# Altium PCB PCB.PcbDoc
Units mil, origin at the board's own origin, x right, y up, seen from the top; angles counter-clockwise.
Board outline 840 x 1570 mil, 2 copper layers (Top Layer, Bottom Layer), stack 61.855 mil thick; 29 components, 28 nets, 130 pads, 35 vias.
Unrouted connection lines stored in the file: 1.
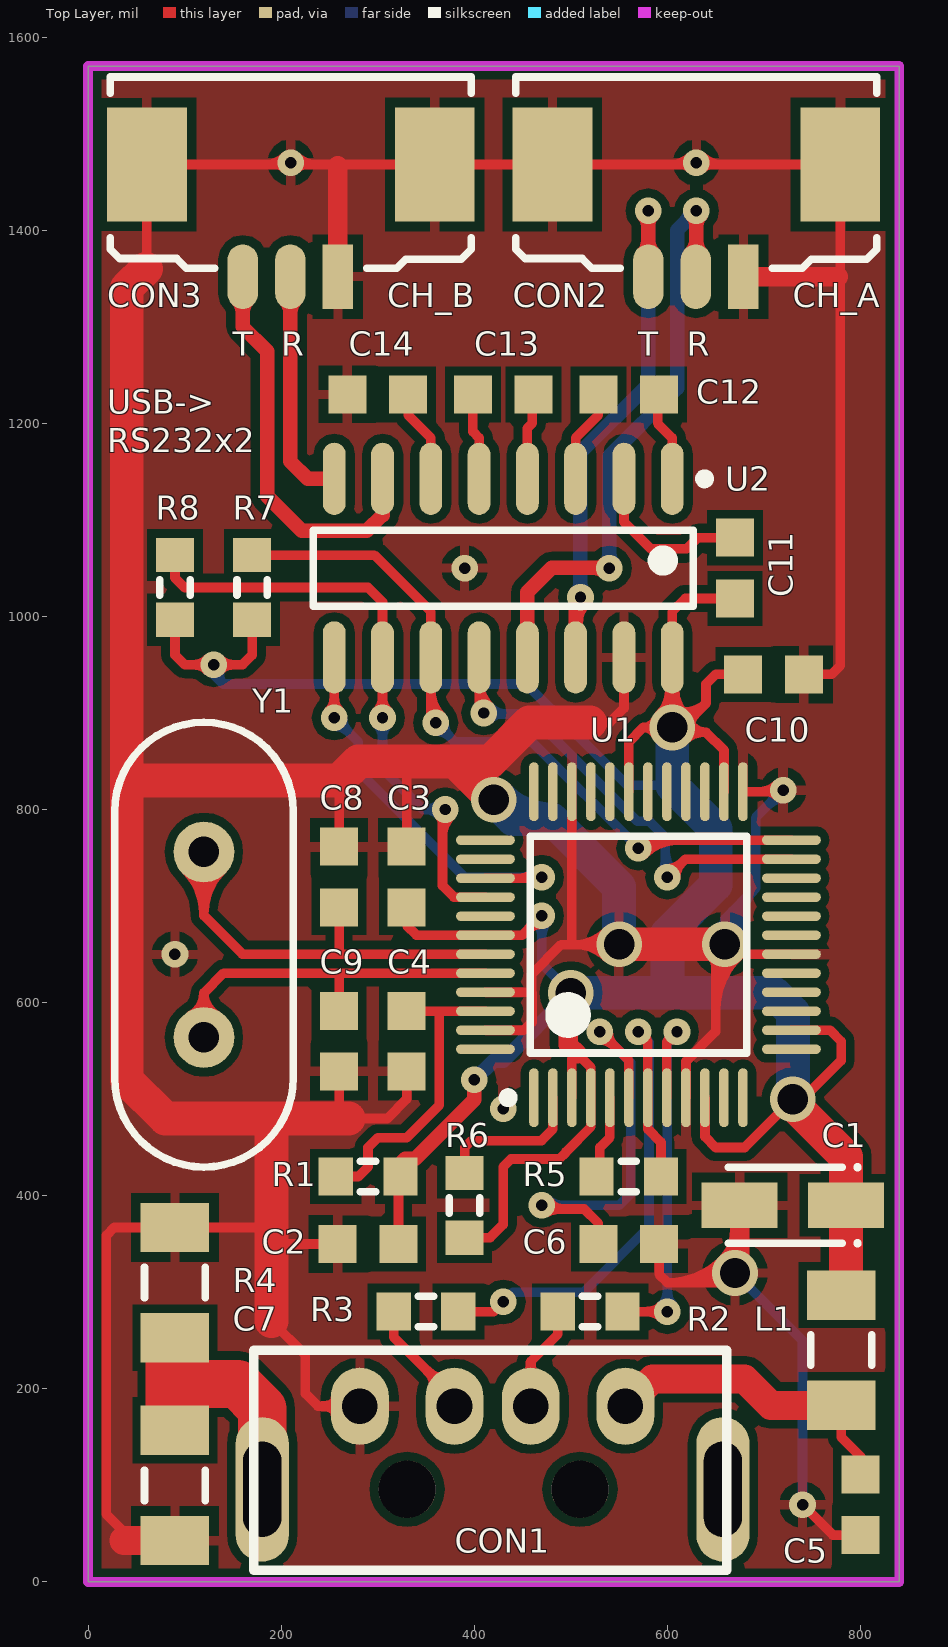
[diagram p0: Top Layer view]
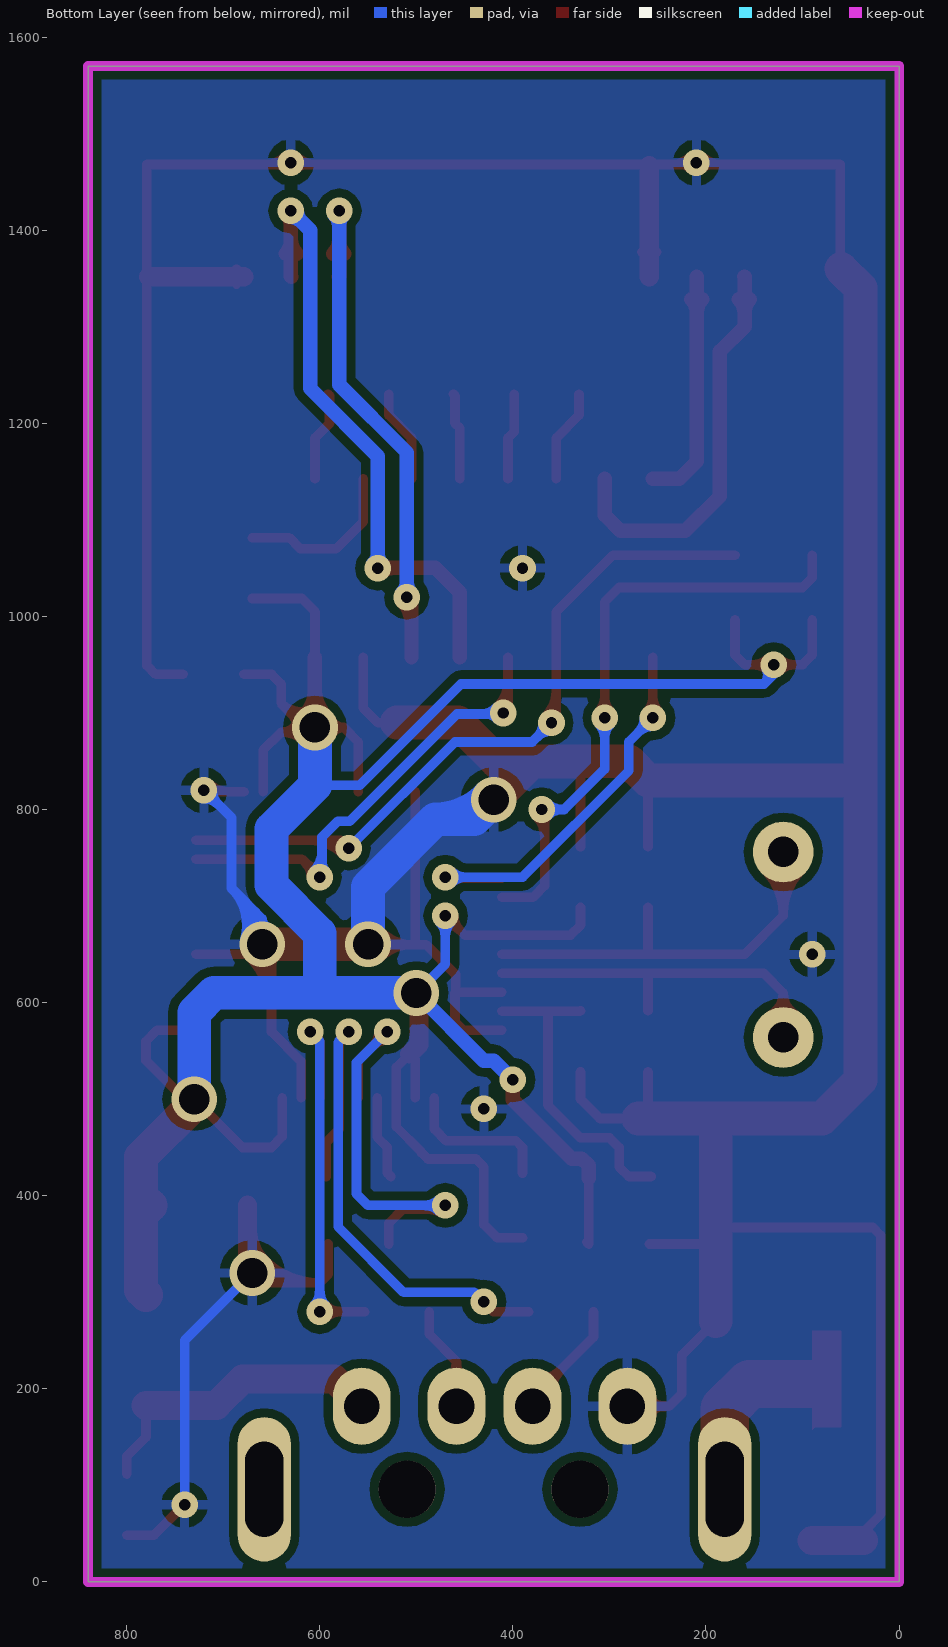
[diagram p1: Bottom Layer view, seen from below]
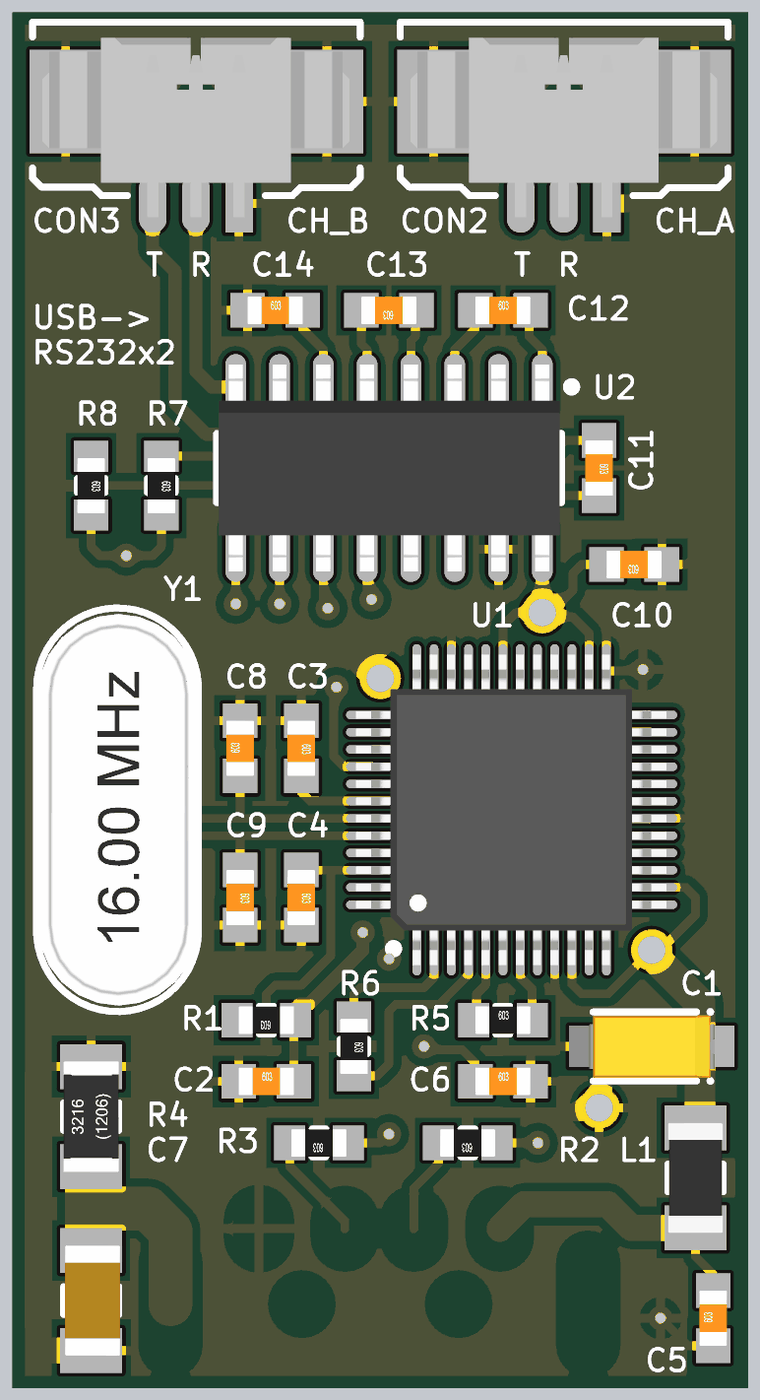
[diagram p2: 3D render of the assembled board from above, using the file's embedded part models]

## Layer stack, top to bottom
Top Solder: solder mask 0.4, Solder Resist, Dk 3.5
Top Layer: signal copper 1.4
Dielectric 1: dielectric 59.0551, FR-4, Dk 4.8
Bottom Layer: signal copper 1.4
Bottom Solder: solder mask 0.4, Solder Resist, Dk 3.5

## Board outline
0,0 0,1570 840,1570 840,0

## Design rules (kind name [scope] priority, off if disabled: settings)
Clearance [All] p1: gap=9
MinimumSolderMaskSliver [All] p1: minsoldermaskwidth=1
PolygonConnect [All] p1: connectstyle=Relief reliefconductorwidth=10 reliefentries=4 polygonreliefangle="90 Angle" airgapwidth=10
RoutingVias [All] p1: holewidth=19.68 width=39.37 viastyle="Through Hole" minholewidth=15.75 minwidth=31.5 maxholewidth=31.5 maxwidth=47.24
SilkToBoardRegionClearance [All] p1 off:
SilkToSilkClearance [All] p1: silktosilkclearance=5
SilkToSolderMaskClearance SilkscreenOverComponentPads [IsPad] p1: minsilkscreentomaskgap=1 clearancetoexposedcopper=TRUE
SolderMaskExpansion [All] p1: expansion=4
UnpouredPolygon [All] p1: allowunpoured=FALSE
Width [All] p1: maxlimit=100 minlimit=8 preferedwidth=12
25 further rules are at their usual default settings.

## Components (designator, comment, footprint, x,y, rotation, side; value= is the part's Value field where it differs from the comment)
C1 "10uF" SMDA 730,390 r180 top
C2 "100nF" CAPC1608N 290,350 r0 top
C3 "100nF" CAPC1608N 330,730 r270 top
C4 "10nF" CAPC1608N 330,560 r270 top
C5 "10nF" CAPC1608N 800,80 r90 top
C6 "33nF" CAPC1608N 560,350 r0 top
C7 "2n2 / 500V" CAPC3216N 90,100 r90 top
C8 "27pF" CAPC1608N 260,730 r90 top
C9 "27pF" CAPC1608N 260,560 r270 top
C10 "100nF" CAPC1608N 710,940 r180 top
C11 "100nF" CAPC1608N 670,1050 r270 top
C12 "100nF" CAPC1608N 560,1230 r0 top
C13 "100nF" CAPC1608N 430,1230 r180 top
C14 "100nF" CAPC1608N 300,1230 r0 top
CON1 "USB-A-Input" USB-A-INPUT 811.5,-333 r90 top
CON2 "MX-53261-0371" MX-53261-0371 630,1410 r180 top
CON3 "MX-53261-0371" MX-53261-0371 210,1410 r180 top
L1 "Ferrite" FERRITE_1206 780,240 r90 top
R1 "470R" RESC1608N 290,420 r180 top
R2 "27R" RESC1608N 520,280 r180 top
R3 "27R" RESC1608N 350,280 r180 top
R4 "10M" RESC3216N 90,310 r270 top
R5 "1.5k" RESC1608N 560,420 r0 top
R6 "10k" RESC1608N 390,390 r270 top
R7 "100K" RESC1608N 170,1030 r270 top
R8 "100K" RESC1608N 90,1030 r270 top
U1 "FT2232D-REEL" LQFP-48_L 570,660 r90 top locked
U2 "MAX202CSE" TI-D16_L 430,1050 r270 top
Y1 "6Mhz" HC-49U 120,660 r270 top

## Footprints (in the part's own frame and the unit in brackets; to place one, negate y for a bottom-side part, rotate by r counter-clockwise, add the part's x,y. Pads: shape width x height; smd on the part's side, far side on the other; paste and mask are expansions set on the pad)
CAPC1608N [mm] "Chip Capacitor, Body 1.6x0.8mm, IPC Medium Density"
  rect 1x1 smd: 1(-0.8,0) 2(0.8,0)
  body extent -0.8,-0.4 0.8,0.4, height 0.3
CAPC3216N [mm] "Chip Capacitor, Body 3.2x1.6mm, IPC Medium Density"
  rect 1.3x1.8 smd: 1(-1.45,0) 2(1.45,0)
  silkscreen extent -0.4,-0.8 0.4,0.8, body extent -1.6,-0.84 1.6,0.76, height 1
FERRITE_1206 [mm] "Chip Resistor, Body 3.2x1.6mm, IPC Medium Density"
  rect 1.3x1.8 smd: 1(-1.45,0) 2(1.45,0)
  silkscreen extent -0.4,-0.8 0.4,0.8, body extent -1.6,-0.8 1.6,0.8, height 1.1
HC-49U [mm] "Quartz Crystal, Thru-Hole; 2 Leads; Body 11.35 x 4.65 x 13.46 mm (LxWxH max)"
  round 1.6 hole 0.8: 1(-2.44,0) 2(2.44,0)
  silkscreen extent -5.85,-2.35 5.85,2.35, body extent -5.67,-2.3 5.68,2.35, height 3.6
LQFP-48_L [mm] "Thin QFP, 48-Leads, Body 7x7mm, Pitch 0.5mm, IPC High Density"
  oval 1.55x0.25 smd: 1(-4.025,2.75) 2(-4.025,2.25) 3(-4.025,1.75) 4(-4.025,1.25) 5(-4.025,0.75) 6(-4.025,0.25) 7(-4.025,-0.25) 8(-4.025,-0.75) 9(-4.025,-1.25) 10(-4.025,-1.75) 11(-4.025,-2.25) 12(-4.025,-2.75) 25(4.025,-2.75) 26(4.025,-2.25) 27(4.025,-1.75) 28(4.025,-1.25) 29(4.025,-0.75) 30(4.025,-0.25) 31(4.025,0.25) 32(4.025,0.75) 33(4.025,1.25) 34(4.025,1.75) 35(4.025,2.25) 36(4.025,2.75)
  oval 0.25x1.55 smd: 13(-2.75,-4.025) 14(-2.25,-4.025) 15(-1.75,-4.025) 16(-1.25,-4.025) 17(-0.75,-4.025) 18(-0.25,-4.025) 19(0.25,-4.025) 20(0.75,-4.025) 21(1.25,-4.025) 22(1.75,-4.025) 23(2.25,-4.025) 24(2.75,-4.025) 37(2.75,4.025) 38(2.25,4.025) 39(1.75,4.025) 40(1.25,4.025) 41(0.75,4.025) 42(0.25,4.025) 43(-0.25,4.025) 44(-0.75,4.025) 45(-1.25,4.025) 46(-1.75,4.025) 47(-2.25,4.025) 48(-2.75,4.025)
  silkscreen extent -4.15,-2.85 2.85,3.55, body extent -4.5,-4.49 4.5,4.51, height 1.56
MX-53261-0371 [mm]
  rect 0.8x1.7 smd: 1(-1.237,1.475)
  oval 0.8x1.7 smd: 2(0.013,1.475) 3(1.263,1.475)
  rect 2.1x3 smd: 4(-3.787,-1.475) 5(3.788,-1.475)
  silkscreen extent -4.75,-3.77 4.75,1.25, body extent -4.44,-3.32 4.46,1.88, height 3.4
RESC1608N [mm] "Chip Resistor, Body 1.6x0.8mm, IPC Medium Density"
  rect 0.9x1 smd: 1(-0.85,0) 2(0.85,0)
  silkscreen extent -0.2,-0.4 0.2,0.4, body extent -0.8,-0.4 0.8,0.4, height 0.3
RESC3216N [mm] "Chip Resistor, Body 3.2x1.6mm, IPC Medium Density"
  rect 1.3x1.8 smd: 1(-1.45,0) 2(1.45,0)
  silkscreen extent -0.4,-0.8 0.4,0.8, body extent -1.6,-0.8 1.6,0.8, height 0.55
SMDA [mm] "Capacitor, SM Tantalum; Body 3.2 x 1.6 mm (LxW typ)"
  rect 2x1.2 smd: 1(-1.4,0) 2(1.4,0)
  silkscreen extent -1.71,-1.01 1.7,1.01, body extent -2.4,-0.9 2.4,0.9, height 1.8
TI-D16_L [mm] "SOIC, 16-Leads, Body 9.9x3.9mm, Pitch 1.27mm, IPC High Density"
  oval 1.9x0.6 smd: 1(-2.35,4.445) 2(-2.35,3.175) 3(-2.35,1.905) 4(-2.35,0.635) 5(-2.35,-0.635) 6(-2.35,-1.905) 7(-2.35,-3.175) 8(-2.35,-4.445) 9(2.35,-4.445) 10(2.35,-3.175) 11(2.35,-1.905) 12(2.35,-0.635) 13(2.35,0.635) 14(2.35,1.905) 15(2.35,3.175) 16(2.35,4.445)
  silkscreen extent -2.47,-5 1,5.42, body extent -3,-4.95 3,4.95, height 1.4
USB-A-INPUT [mil]
  oval 80x60 hole 37: 1(515,255) 2(515,353) 3(515,432) 4(515,530)
  oval 149.61x55.12 hole 39.37 slot 98.43 at 0 deg: 5(429,631) 5(429,154)
  round 59.06 hole 59.06 unplated: ""(429,481) ""(429,302)
  silkscreen extent 345,150 573,640, body extent -264,142 520,638, height 122

## Part data
C1: library part "100uF 6.3V-SMDB", "Polarized Capacitor (Surface Mount)"
C2 C3 C4 C5 C6 C7 C8 C9 C10 C11 C12 C13 C14: library part Capacitor, "Capacitor"
CON2 CON3: "Pitch 1.25mm, 3-pin"
L1: library part Inductor, "Inductor"
R1 R2 R3 R4 R5 R6 R7 R8: library part Resistor, "Resistor"
U1: library part COM-UART-FT2232D-SQ48, "FT2232D Dual USB to Serial UART/FIFO IC, -40 to +85 degC, 48-Pin LQFP, Pb-Free, Tape and Reel"
U2: "+5V RS-232 Transceiver with 0.1µF External Capacitor"
Y1: library part XTAL, "Crystal Oscillator"

## Via types
v1: diameter 27.56, hole 11.81, Top Layer to Bottom Layer, 19 vias
v2: diameter 27.56/27.56 (per signal layer), hole 11.81, Top Layer to Bottom Layer, 9 vias
v3: diameter 47.24, hole 31.5, Top Layer to Bottom Layer, 7 vias

## Nets (pads, with @x,y where several pads share a name; then routed paths per layer and width w, separated by ;. In a path a pad name is that pad's centre, name@x,y a point inside that pad or via, vN(x,y) a via of type N, cw(c..) or ccw(c..) an arc to the next point about the centre after c; other vN are vias at no path point)
5V: C1.1 C2.2 C3.2 C10.2 C11.2 L1.2 R1.1 R6.2 R7.2 R8.2 U1.3 U1.4 U1.10 U1.14 U1.26 U1.31 U1.42 U2.16 | length 3761.5
  Top Layer w10: R8.2 90,960 100,950 v1(130,950) 160,950 170,960 R7.2 ; v1@123.79,943.79 ccw(c108.8,928.8) 108.8,950 ccw(c108.8,971.2) v1@123.79,956.21 ; v1@136.21,943.79 cw(c151.2,928.8) 151.2,950 cw(c151.2,971.2) v1@136.21,956.21 ; R1.1@321.5,418.03 C2.2 C2.2@323.46,351.97 ; C3.2 330,680 340.16,669.84 U1.42 449.84,669.84 v2(470,690) ; R6.2 416.54,356.54 430,370 430,430 438.02,438.02 488.02,438.02 494.82,444.82 494.82,445.48 520.79,471.45 U1.4 520.79,532.86 506.82,546.82 501.1,541.1 U1.3 ; v2@461.22,690 cw(c440.02,690) 455.01,675.01 cw(c470,660.02) v2@470,681.22 ; U1.31 560.16,870.16 575,885 ; v3@588.31,876.74 ccw(c575,870.15) 575,885 ; v3@588.31,893.26 cw(c575,899.85) 575,885 ; U2.16 605,1005 618.5,1018.5 C11.2 ; v3@607.58,893.23 ccw(c613.74,912.9) 628.32,898.32 ; v3@610.57,902.77 ccw(c619.32,930.68) 640,910 ; v3@618.17,871.83 cw(c637.89,852.11) 637.89,880 ; v3@622.27,891.97 ccw(c640,899.12) 640,880 ; v3@623.62,885 cw(c644.44,885) 629.72,899.72 ; U1.10 638.9,461.1 650,450 680,450 v3(730,500) 740,500 780,540 780,560 768.58,571.42 U1.14 ; U1.26 658.58,861.42 640,880 ; C10.2 650,940 640,930 640,910 ; 575,885 v3(605,885) ; v3(605,885) 615,885 640,910 ; v3(605,885) 610,880 640,880
  Top Layer w15: R1.1@321.5,418.03 321.5,431.5 328.5,438.5 338.91,438.5 400,499.59 v2(400,520) ; v3@593.6,896.4 ccw(c566.08,923.92) 605,923.92 ccw(c643.92,923.92) v3@616.4,896.4 ; v3(605,885) U2.16
  Top Layer w20: v3(500,610) 497.22,607.22 497.22,556.42 506.82,546.82
  Top Layer w35: v3(730,500) 730,495.12 785.12,440 C1.1 785.12,302.2 L1.2 ; C1.1@775.12,390 C1.1@780,385.12
  Bottom Layer w10: v1(130,950) 130,940 140,930 ; v1@137.71,945.81 ccw(c149.43,939.43) 140,930 ; v2@463.79,683.79 cw(c448.8,668.8) 470,668.8 cw(c491.2,668.8) v2@476.21,683.79 ; v2(470,690) 470,640 v3(500,610) ; 605,825 558.74,825 453.74,930 140,930
  Bottom Layer w15: v2(400,520) 420,540 430,540 v3(500,610)
  Bottom Layer w35: v3(500,610) 500.28,610.28 600,610.28 ; v3(605,885) 605,825 650,780 650,721.69 600.12,671.82 600.12,610.4 600,610.28 ; v3(730,500) 730,590 709.72,610.28 600,610.28
AVCC: C4.1 R1.2 U1.46 | length 323.7
  Top Layer w10: R1.2 280,420 290,430 290,450 300,460 330,460 363.69,493.69 363.69,586.31 ; C4.1 330.39,591.1 U1.46
D+: R3.1 R5.2 U1.7 | length 615.3
  Top Layer w10: R3.1 420,280 v2(430,290) ; v2(570,570) 579.84,560.16 ; v2@572.93,561.72 cw(c575.14,555.46) 579.84,560.16 ; v2@578.28,567.07 ccw(c584.54,564.86) 579.84,560.16 ; R5.2 593.46,455.25 579.84,468.87 U1.7 579.84,560.16
  Bottom Layer w10: v2(430,290) 440,300 513.13,300 581,367.87 581,559 v2(570,570)
D-: R2.1 U1.8 | length 430.8
  Top Layer w10: R2.1 v2(600,280) ; U1.8 599.53,559.53 ; v1@601.57,567.53 cw(c593.8,565.26) 599.53,559.53 ; v1@607.53,561.57 ccw(c605.26,553.8) 599.53,559.53 ; v1(610,570) 599.53,559.53
  Bottom Layer w10: v2(600,280) 600,560 v1(610,570)
GND: C1.2 C2.1 C3.1 C4.2 C5.1 C6.2 C7.1 C8.2 C9.2 C10.1 C14.1 CON1.4 CON2.1 CON2.4 CON2.5 CON3.1 CON3.4 CON3.5 R4.1 U1.9 U1.18 U1.25 U1.34 U1.45 U1.47 U2.15 | length 7238.3
  Top Layer w10: 37.09,42.91 37.09,51.91 19,70 19,359 27.09,367.09 R4.1 182.91,367.09 190,360 200,350 C2.1 ; 60,1360 60.89,1360.89 CON3.5 260,1468.07 ; 184.15,1468.07 ccw(c184.15,1495.85) v1@203.79,1476.21 ; 190,270 225,235 225,195 238,182 CON1.4 ; 193.46,1468.07 cw(c193.46,1453.46) v1@203.79,1463.79 ; v1@216.21,1463.79 cw(c226.54,1453.46) 226.54,1468.07 ; v1@216.21,1476.21 ccw(c235.85,1495.85) 235.85,1468.07 ; CON3.1@251.12,1377.25 ccw(c232.77,1395.59) 258.72,1395.59 ccw(c284.67,1395.59) CON3.1@266.32,1377.25 ; 258.72,1466.79 260,1468.07 ; C9.2 260,490 270,480 310,480 330,500 C4.2 ; C8.2 260,830 ; C3.1 330,850 ; U1.47 451.42,571.42 460,580 460,610 459.21,610.79 ; U1.45 459.21,610.79 ; U1.34 501.1,661.1 500,660 ; 504.06,660 ccw(c504.06,706.34) v3@536.83,673.57 ; 506.02,660 cw(c506.02,616.43) v3@536.83,647.24 ; 520,890 540,890 555,905 U2.15 ; v3(550,660.41) 549.59,660 500,660 ; C6.2 591.5,318.5 600,310 660,310 v3(670,320) v3@674.88,324.88 ; 600.9,310 ccw(c600.9,389.1) v3@656.83,333.17 ; 604.15,1468.07 ccw(c604.15,1495.85) v1@623.79,1476.21 ; 613.46,1468.07 cw(c613.46,1453.46) v1@623.79,1463.79 ; U1.9 619.21,539.21 650,570 650,650 660,660 670,650 728.31,650 U1.18 ; 625.04,310 ccw(c625.04,364.96) v3@663.9,326.1 ; v1@636.21,1463.79 cw(c646.54,1453.46) 646.54,1468.07 ; v1@636.21,1476.21 ccw(c655.85,1495.85) 655.85,1468.07 ; v3@646.43,647.24 cw(c637.8,638.61) 650,638.61 ; 650,592.28 cw(c727.72,592.28) v3@672.76,647.24 ; 650,616.43 cw(c703.57,616.43) v3@665.69,654.31 ; U1.25 v1@718.46,818.46 ; CON2.1@686.32,1344.33 cw(c704.67,1325.98) 704.67,1351.93 cw(c704.67,1377.88) CON2.1@686.32,1359.53 ; 695.1,818.46 ccw(c695.1,844.9) v1@713.79,826.21 ; 702.51,818.46 cw(c702.51,802.51) v1@713.79,813.79 ; v2(740,80) 771.5,48.5 C5.1 ; C10.1 770,940 779.11,949.11 779.11,1350 ; 777.18,1351.93 779.11,1350 ; 260,1468.07 CON3.4 CON2.5 CON2.4 779.11,1350 ; 459.21,610.79 459.21,629.21 490,660 500,660
  Top Layer w20: CON3.1 258.72,1466.79 ; v3@660.37,329.63 ccw(c625.33,364.67) 674.88,364.67 ; v3@674.88,324.88 C1.2 ; CON2.1 777.18,1351.93
  Top Layer w30: 37.09,42.91 C7.1
  Top Layer w35: 60,1360 40,1340 40,830 ; 190,270 190,360 190,480 ; 270,480 190,480 ; v3(420,810) 380.28,849.72 ; 520,890 456.96,890 416.68,849.72 380.28,849.72 ; v3(550,660.41) v3(659.59,660.41) ; 40,830 40,520 80,480 190,480 ; 40,830 260,830 280,850 330,850 330.28,849.72 380.28,849.72
  Bottom Layer w10: v3@653.39,677.96 ccw(c650.28,686.74) 659.59,686.74 ; v3@658.27,660.03 cw(c692.22,669.51) 667.29,694.44 ; v3(659.59,660.41) 659.59,686.74 ; v3@665.8,677.96 cw(c668.9,686.74) 659.59,686.74 ; v3@667.9,662.72 cw(c711.14,674.79) 679.4,706.54 ; v3(670,320) 740,250 v2(740,80) ; v3@677.53,665.41 cw(c730.07,680.08) 691.5,718.64 ; v1@711.22,820 cw(c690.02,820) 705.01,805.01 cw(c720,790.02) v1@720,811.22 ; v1(720,820) 691.5,791.5 691.5,718.65 ; 659.59,686.74 691.5,718.65
  Bottom Layer w35: v3(420,810) 440,790 480,790 ; v3@424.48,814.17 ccw(c480,865.84) 480,790 ; v3(550,660.41) 550,720 480,790
  other v1: 90,650 390,1050 210,1470 630,1470
  other v2: 430,490
NetC6_1: C6.1 U1.6 | length 480.1
  Top Layer w10: v2(470,390) 473.69,386.31 513.69,386.31 528.5,371.5 C6.1 ; v2@530,561.22 cw(c530,540.02) 544.99,555.01 cw(c559.98,570) v2@538.78,570 ; v2(530,570) 560.16,539.84 U1.6
  Bottom Layer w10: v2(470,390) 550,390 562,402 562,538 v2(530,570)
NetC8_1: C8.1 U1.43 Y1.1 | length 585.5
  Top Layer w10: Y1.1@101.26,737.33 cw(c56.03,692.1) 120,692.1 cw(c183.97,692.1) Y1.1@138.74,737.33 ; Y1.1@108.34,744.4 cw(c80.18,716.24) 120,716.24 cw(c159.82,716.24) Y1.1@131.66,744.4 ; Y1.1 120,690 159.84,650.16 260,650.16 ; C8.1 260,650.16 ; U1.43 260,650.16
NetC9_1: C9.1 U1.44 Y1.2 | length 441
  Top Layer w10: Y1.2@106.68,586.84 ccw(c93.21,610) 120,610 ; Y1.2 120,610 ; Y1.2@133.32,586.84 cw(c146.79,610) 120,610 ; C9.1 260,630.47 ; U1.44 260,630.47 ; 120,610 140.47,630.47 260,630.47
NetC11_1: C11.1 U2.2 | length 175.9
  Top Layer w10: U2.2 555,1097.99 582.99,1070 620,1070 631.5,1081.5 C11.1
NetC12_1: C12.1 U2.3 | length 97.2
  Top Layer w10: U2.3 505,1185 528.5,1208.5 C12.1
NetC12_2: C12.2 U2.1 | length 94.3
  Top Layer w10: C12.2 590,1228.5 590,1200 605,1185 U2.1
NetC13_1: C13.1 U2.4 | length 90.2
  Top Layer w10: U2.4 455,1195 460,1200 460,1228.5 C13.1
NetC13_2: C13.2 U2.5 | length 90.2
  Top Layer w10: C13.2 398.5,1191.5 405,1185 U2.5
NetC14_2: C14.2 U2.6 | length 97.2
  Top Layer w10: C14.2 331.5,1208.5 355,1185 U2.6
NetCON1_2: CON1.2 R2.2 | length 111.7
  Top Layer w10: CON1.2 458.5,228.5 486.54,256.54 R2.2
  Bottom Layer w10: CON1.2@458.5,154.96 CON1.2@460,153.46
NetCON1_3: CON1.3 R3.2 | length 124.1
  Top Layer w10: R3.2 316.54,253.46 379.5,190.5 CON1.3
NetR5_1: R5.1 U1.5 | length 87.3
  Top Layer w10: R5.1 530,423.46 530,450 540.47,460.47 U1.5
NetR6_1: R6.1 U1.2 | length 158.4
  Top Layer w10: R6.1 390,450 397.02,457.02 469.57,457.02 481.42,468.87 U1.2
RX1: U1.23 U2.12 | length 609.1
  Top Layer w10: U2.12@405,933.27 ccw(c443.27,933.27) v1@416.21,906.21 ; U2.12 405,905 v1(410,900) ; v1(600,730) 618.58,748.58 U1.23 ; v1@600,738.78 ccw(c600,759.98) 614.99,744.99 ccw(c629.98,730) v1@608.78,730
  Bottom Layer w10: v1(410,900) 411,899 457.87,899 569.09,787.78 581.51,787.78 597.78,771.51 597.78,732.22 v1(600,730) ; v1@416.21,893.79 cw(c428.78,881.22) 428.78,899 ; v1@416.21,906.21 ccw(c433.61,923.61) 433.61,899 ; v1@593.79,736.21 ccw(c584.16,745.84) 597.78,745.84 ; 597.78,756.56 ccw(c626.56,756.56) v1@606.21,736.21
RX2: U1.39 U2.9 | length 588.8
  Top Layer w10: v1(255,895) U2.9 ; U1.39 468.9,728.9 v1(470,730) ; 446.14,728.9 ccw(c446.14,753.86) v1@463.79,736.21 ; 451.47,728.9 cw(c451.47,711.47) v1@463.79,723.79 ; 255,916.2 ccw(c276.2,916.2) 261.21,901.21 cw(c276.2,916.2) 255,916.2 ; 255,916.2 cw(c233.8,916.2) 248.79,901.21 ccw(c233.8,916.2) 255,916.2
  Bottom Layer w10: v1@255,886.22 cw(c255,865.02) 269.99,880.01 cw(c284.98,895) v1@263.78,895 ; v1(255,895) 280,870 280,840 390,730 v1(470,730) ; v1@463.79,723.79 ccw(c448.8,708.8) 448.8,730 ccw(c448.8,751.2) v1@463.79,736.21
RXD1: CON2.2 U2.13 | length 789
  Top Layer w15: U2.13 455,1025 480.28,1050.28 539.72,1050.28 v1(540,1050) ; 524.16,1050.28 cw(c524.16,1034.16) v1@535.56,1045.56 ; 525.52,1050.28 ccw(c525.52,1064.49) v1@535.56,1054.44 ; CON2.2@623.68,1375.48 ccw(c608.41,1390.75) 630,1390.75 ; CON2.2 630,1352.42 v1(630,1420) ; 630,1388.37 ccw(c648.23,1388.37) CON2.2@635.34,1375.48 ; 630,1404.84 ccw(c614.84,1404.84) 625.56,1415.56 cw(c614.84,1404.84) 630,1404.84 ; 630,1404.84 cw(c645.16,1404.84) 634.44,1415.56 ccw(c645.16,1404.84) 630,1404.84
  Bottom Layer w15: v1@535.56,1054.44 ccw(c524.84,1065.16) 540,1065.16 ccw(c555.16,1065.16) v1@544.44,1054.44 ; v1(540,1050) 540,1166.06 610,1236.06 610,1400 v1(630,1420) ; v1@623.72,1420 cw(c608.56,1420) 619.28,1409.28 cw(c630,1398.56) v1@630,1413.72
RXD2: CON3.2 U2.8 | length 275.7
  Top Layer w15: CON3.2@203.68,1328.38 cw(c189.6,1314.3) 209.51,1314.3 cw(c229.42,1314.3) CON3.2@215.34,1328.38 ; CON3.2 209.51,1160.49 227.48,1142.52 U2.8
SHIELD: C7.2 CON1.5 R4.2 | length 184.6
  Top Layer w50: 90,205 155,205 180.5,179.5 CON1.5@180.5,96
TX1: R7.1 U1.24 U2.11 | length 874
  Top Layer w10: R7.1 296.54,1063.46 355,1005 U2.11 355,895 v1(360,890) ; U2.11@355,923.27 ccw(c393.27,923.27) v1@366.21,896.21 ; v1@569.14,760.86 cw(c587.01,742.99) 587.01,768.27 ; v1(570,760) 578.27,768.27 U1.24 ; v1@576.21,753.79 cw(c611.16,718.84) 611.16,768.27
  Bottom Layer w10: v1@360,881.22 cw(c360,860.02) 374.99,875.01 cw(c389.98,890) v1@368.78,890 ; v1(360,890) 380,870 460,870 v1(570,760)
TX2: R8.1 U1.40 U2.10 | length 767.1
  Top Layer w10: R8.1 90,1040 100,1030 290,1030 305,1015 U2.10 v1(305,895) ; v1@298.79,901.21 ccw(c283.8,916.2) 305,916.2 ccw(c326.2,916.2) v1@311.21,901.21 ; v1@363.79,793.79 cw(c355.99,785.99) 367.02,785.99 ; 367.02,771.62 cw(c398.38,771.62) v1@376.21,793.79 ; v1(370,800) 367.02,797.02 367.02,721.06 378.87,709.21 U1.40
  Bottom Layer w10: v1@298.79,888.79 cw(c283.8,873.8) 305,873.8 cw(c326.2,873.8) v1@311.21,888.79 ; v1(305,895) 305,841.87 346.87,800 v1(370,800) ; v1@363.79,793.79 ccw(c348.8,778.8) 348.8,800 ccw(c348.8,821.2) v1@363.79,806.21
TXD1: CON2.3 U2.14 | length 690
  Top Layer w15: U2.14 505,1015 v1(510,1020) ; U2.14@505,992.77 cw(c537.23,992.77) v1@514.44,1015.56 ; CON2.3@574.46,1375.48 ccw(c561.1,1388.85) 580,1388.85 ; v1@575.56,1415.56 cw(c564.84,1404.84) 580,1404.84 cw(c595.16,1404.84) v1@584.44,1415.56 ; 580,1390.27 ccw(c600.92,1390.27) CON2.3@586.13,1375.48 ; v1(580,1420) 580,1352.22 CON2.3
  Bottom Layer w15: v1@505.56,1024.44 ccw(c495.52,1034.48) 509.72,1034.48 ; 509.72,1035.84 ccw(c525.84,1035.84) v1@514.44,1024.44 ; v1(510,1020) 509.72,1020.28 509.72,1169.72 580,1240 v1(580,1420) ; v1@575.56,1415.56 cw(c564.84,1404.84) 580,1404.84 cw(c595.16,1404.84) v1@584.44,1415.56
TXD2: CON3.3 U2.7 | length 448.1
  Top Layer w15: CON3.3@154.46,1328.38 cw(c141.1,1315.01) 160,1315.01 ; 160,1313.59 cw(c180.92,1313.59) CON3.3@166.13,1328.38 ; CON3.3 160,1351.63 160,1300 185.51,1274.49 185.51,1124.49 221.38,1088.62 288.62,1088.62 305,1105 U2.7
VUSB: C5.2 CON1.1 L1.1 | length 326
  Top Layer w10: L1.1 780,150 800,130 C5.2
  Top Layer w30: CON1.1 584.5,210 680,210 707.09,182.91 L1.1
pads on no net: CON1. U1.1 U1.11 U1.12 U1.13 U1.15 U1.16 U1.17 U1.19 U1.20 U1.21 U1.22 U1.27 U1.28 U1.29 U1.30 U1.32 U1.33 U1.35 U1.36 U1.37 U1.38 U1.41 U1.48

## Polygon pours and split planes (outlines as drawn)
GND on Bottom Layer "GND_BOT" (solid, remove dead copper, pour order 4): 0,0 840,0 840,1570 0,1570 0,0
GND on Top Layer "GND_TOP" (solid, remove dead copper, pour order 2): 0,0 840,0 840,1570 0,1570 0,0

## Keep-outs
Keep-Out Layer:
  the board outline again, w10

## Other copper
Top Layer:
  region net SHIELD: 60,260 60,160 87.09,160 90,157.09 90,260

## Silkscreen, mask and mechanical layers (free items; w line width, h text height)
Top Overlay:
  text "CH_B" at 310,1320 h25
  text "CH_A" at 730,1320 h25
  text "T" at 150,1270 h25
  text "R" at 200,1270 h25
  text "T" at 570,1270 h25
  text "R" at 620,1270 h25
  text "USB->" at 20,1210 h25
  text "RS232x2" at 20,1170 h25

## Dimensions
0,1570 to 0,0 on Mechanical 15
0,1570 to 840,1570 on Mechanical 15